# Altium PCB LUX_36.PcbDoc
Units mil, origin at the board's own origin, x right, y up, seen from the top; angles counter-clockwise.
Board outline 2857.83 x 2678 mil, 2 copper layers (Top, Bottom), stack 12.7 mil thick; 77 components, 75 nets, 253 pads, 95 vias.
Unrouted connection lines stored in the file: 1.
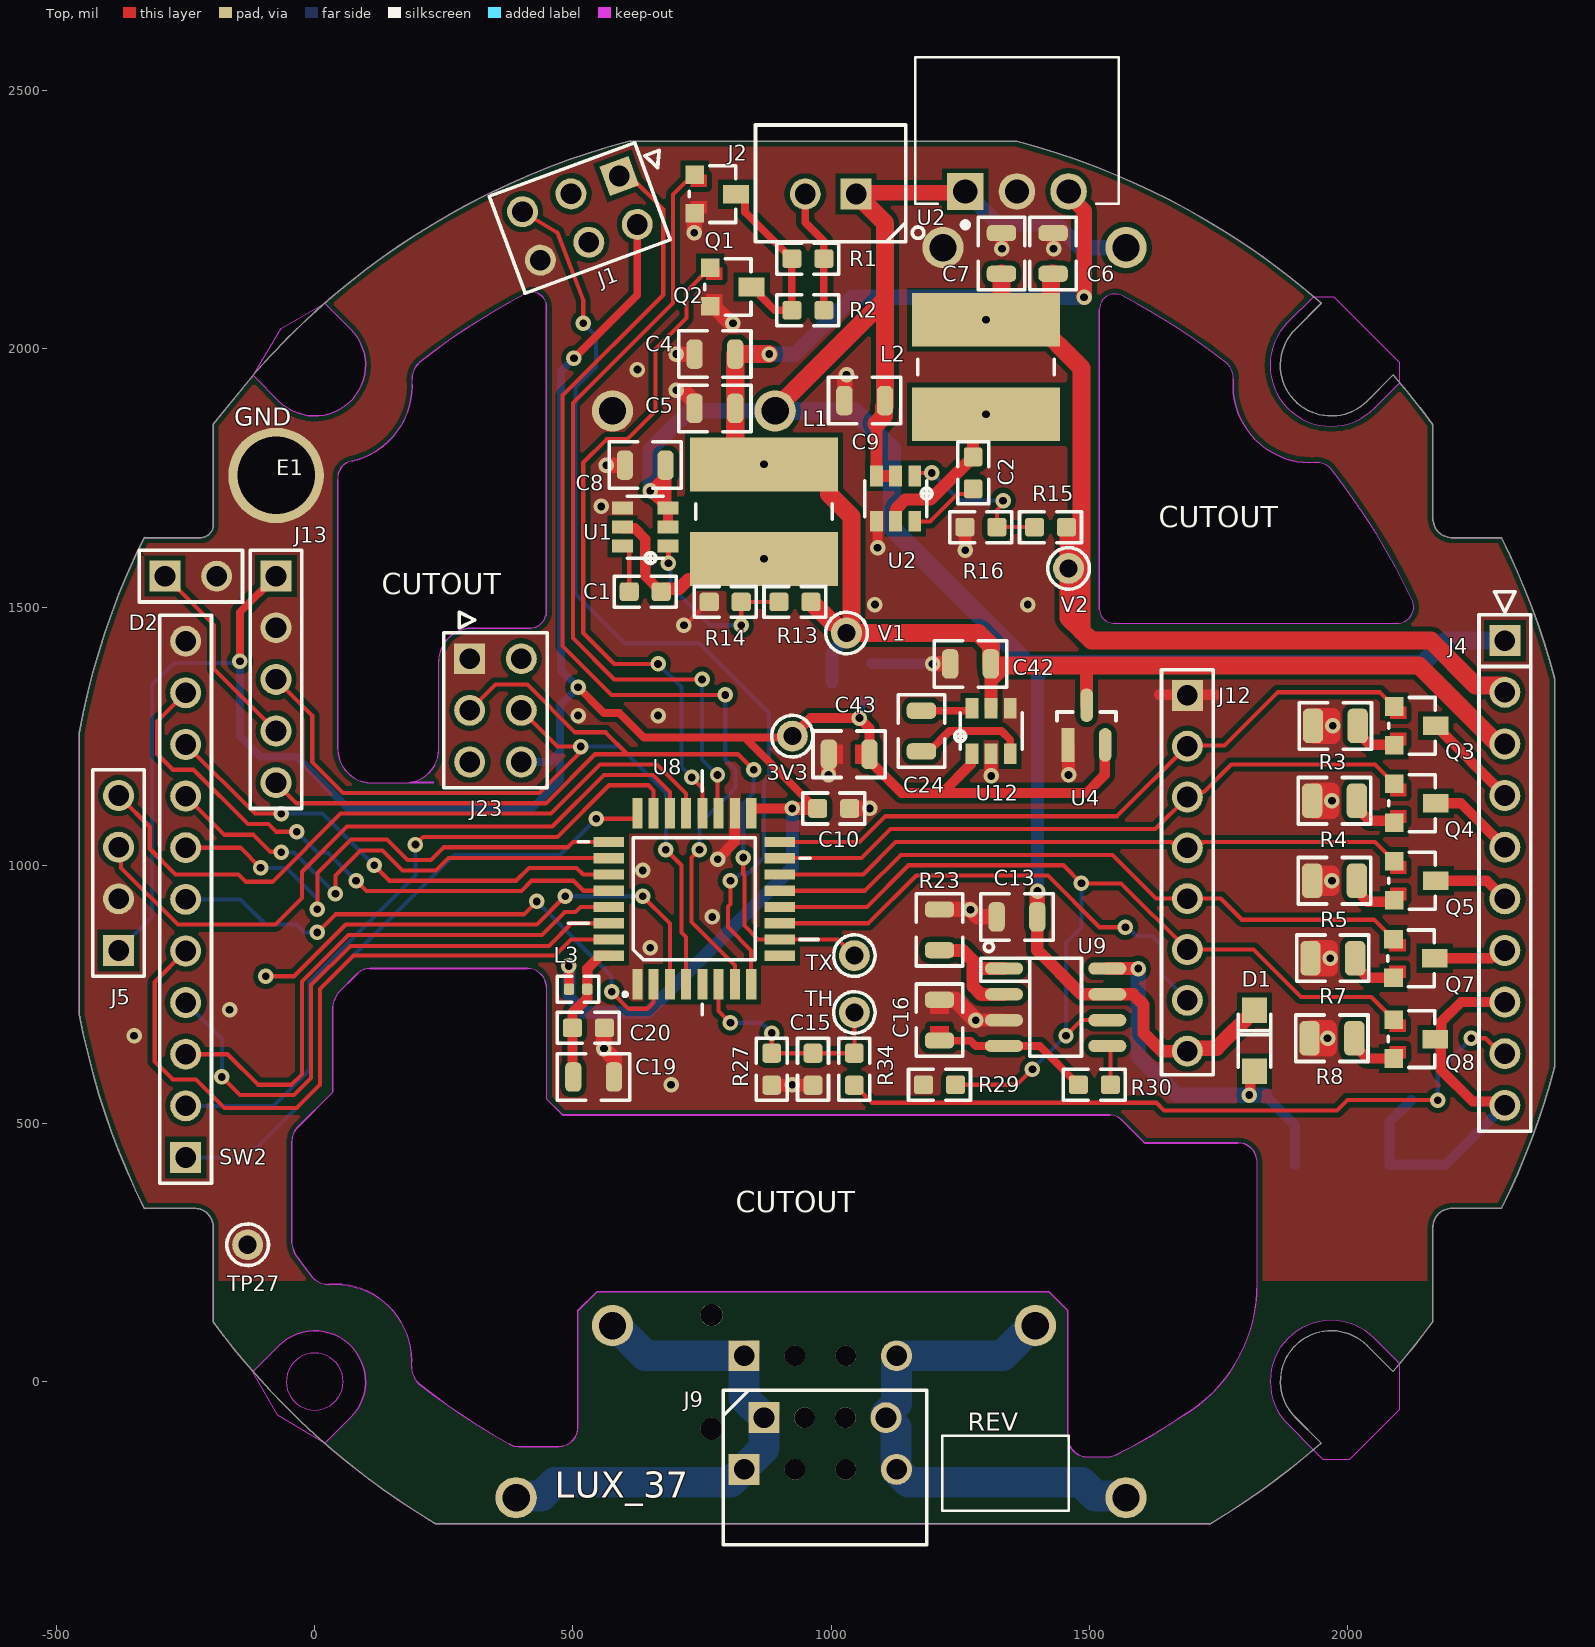
[diagram p0: Top view]
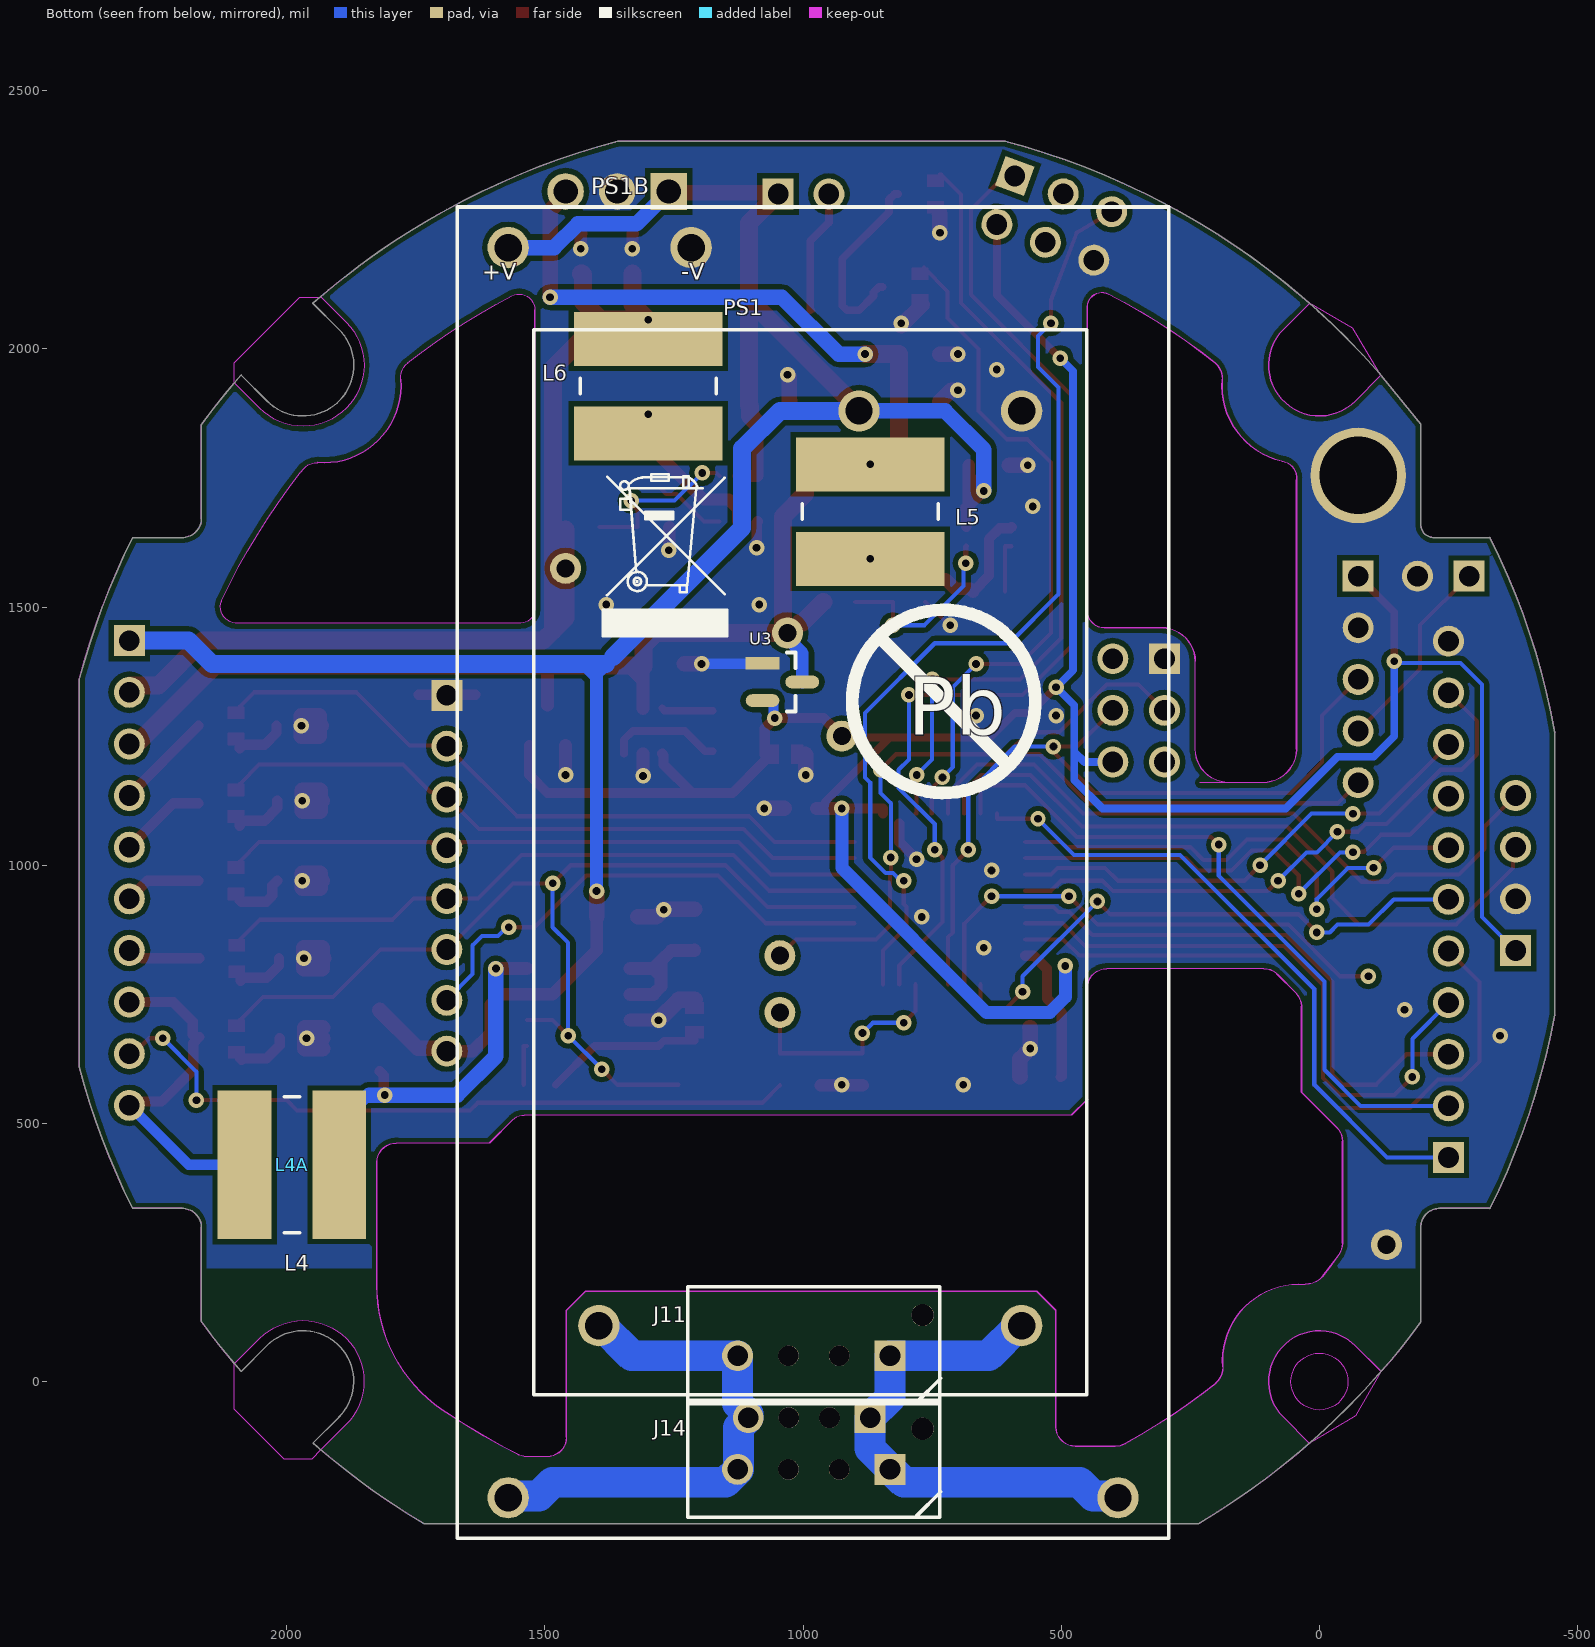
[diagram p1: Bottom view, seen from below]

## Layer stack, top to bottom
Solder Mask Top: solder mask 0.4, Solder Resist, Dk 3.5
Top: signal copper 1.35
Dielectric 1: dielectric 10, FR-4, Dk 4.3
Bottom: signal copper 1.35
Solder Mask Bottom: solder mask 0.4, Solder Resist, Dk 3.5

## Board outline
-455.92,710.72 -456,1257.14 -456.03,1256.97 cw(c917.91,1009.76) -330.5,1634.5 -221.5,1634.5 -221.52,1634.5 ccw(c-221.61,1659.6) -196.5,1659.5 -196.5,1854.5 -110.85,1959 cw(c981.02,993.15) 608.5,2402.5 1358.5,2402.5 1359.4,2402.26 cw(c985.76,987.39) 1949.56,2088.56 1898.92,2037.92 ccw(c1968.42,1968.42) 2037.92,1898.92 2088.59,1949.59 2088.78,1949.37 cw(c1008.19,1005.95) 2165.5,1853.5 2165.5,1671.5 2165.5,1671.52 ccw(c2202.87,1671.87) 2202.5,1634.5 2298.5,1634.5 2298.52,1634.46 cw(c1018.24,995.55) 2401.5,1361.5 2401.5,608.5 2401.8,609.65 cw(c1023.93,972.31) 2298.5,335.5 2202.5,335.5 ccw(c2202.56,298.44) 2165.5,298.5 2165.5,116.5 2166.08,117.31 cw(c1147.65,849.29) 2088.29,19.71 2038.12,69.88 ccw(c1968.62,0.38) 1899.12,-69.12 1949.15,-119.15 1948.73,-119.52 cw(c976.38,990.85) 1734.5,-275.5 234.5,-275.5 233.79,-275.08 cw(c972.55,969.42) -114.16,13.59 cw(c762.8,806.4) -196.5,115.5 -196.5,298.5 -196.5,298.48 ccw(c-233.22,298.78) -233.5,335.5 -330.5,335.5 -330.12,334.73 cw(c961.8,976.04)
cut-out: 1934.06,-132.11 1951.96,-150 2005,-150 2101.32,-53.68 2101.32,34.72 2052.14,83.89 ccw(c1968.62,0.38) 1885.11,-83.14
cut-out: 1884.9,2051.94 ccw(c1968.42,1968.42) 2051.94,1884.9 2101.53,1934.5 2101.55,1934.52 2101.55,1973.45 1975,2100 1936.05,2100 1934.47,2101.59 1934.56,2101.59
cut-out: 69.5,-69.5 19.48,-119.02 -71.5,-65 -119.94,19.06 -69.5,69.5 cw(c0,0)
cut-out: -69.5,1899 -119.02,1949.02 -65,2040 19.06,2088.44 69.5,2038 cw(c0,1968.5)
cut-out: -55.12,0 ccw(c0,0) 0,-55.12 ccw(c0,0) 55.12,0 ccw(c0,0) 0,55.12 ccw(c0,0)
cut-out: 109.71,1159.49 ccw(c109.72,1159.6) 109.72,1159.49 ccw(c110.09,1223.16) 109.76,1159.48 ccw(c109.76,1159.97) 109.78,1159.49 230,1159.49 ccw(c230,1160) 230.51,1160 ccw(c230,1160) 230,1160.51 186.25,1160.51 ccw(c174.65,1225.35) 240.52,1225 ccw(c240.48,1225) 240.52,1225.01 240.52,1395 cw(c305.36,1394.65) 304.16,1459.49 417,1459.49 ccw(c416.89,1491.86) 448.44,1484.59 ccw(c448.75,1485) 449.26,1485 449.26,2081.75 cw(c442.37,2081.74) 449.26,2081.74 449.26,2081.75 ccw(c421.09,2081.74) 408.86,2107.11 ccw(c409,2106.62) 408.76,2107.07 ccw(c991.45,978.13) 202.32,1973.77 ccw(c202.64,1973.37) 202.19,1973.64 ccw(c202.35,1973.15) 202.01,1973.53 ccw(c230.17,1942.03) 187.92,1941.14 ccw(c188.44,1941.15) 187.93,1941.06 ccw(c188.44,1941.04) 187.93,1941 cw(c38.55,1928.98) 188.42,1928.98 cw(c38.58,1928.98) 73.13,1783.18 ccw(c77.14,1750.31) 44.24,1746.64 ccw(c136.34,1756.74) 44.24,1746.62 44.24,1746.64 44.24,1225 ccw(c44.75,1225) 44.24,1224.98 cw(c54.36,1225.02) 44.24,1225.01 44.24,1224.98 ccw(c110.1,1225.35)
cut-out: -4.96,202.03 ccw(c27.57,232.37) 27.24,187.88 ccw(c27.31,188.41) 27.35,187.88 cw(c38.99,39.99) 187.34,39.99 cw(c39.12,39.98) 186.88,28.37 cw(c186.87,28.36) 186.88,28.35 186.88,28.33 cw(c187.35,28.32) 186.88,28.37 186.88,28.33 ccw(c187.39,28.31) 186.88,28.28 ccw(c233.14,29.27) 200.68,-3.7 ccw(c201.13,-3.46) 200.81,-3.86 ccw(c991.32,993.51) 376.27,-120.65 ccw(c376.52,-120.2) 376.84,-120.61 ccw(c377.35,-120.66) 377.08,-121.1 ccw(c393.74,-93.92) 395.2,-125.76 ccw(c392.35,-62.85) 395.24,-125.76 395.19,-125.76 472.75,-125.76 ccw(c472.42,-87.92) 510.27,-88.25 ccw(c510.01,-88.25) 510.26,-88.24 510.26,137.54 546.96,174.24 1421.54,174.24 1458.24,137.54 1458.24,-108.25 ccw(c1495.75,-108.25) 1495.75,-145.76 1535.06,-145.76 ccw(c1535.06,-145.25) 1535.12,-145.76 ccw(c1535.13,-145.22) 1535.15,-145.76 ccw(c1533.07,-99.87) 1550.5,-142.37 ccw(c1550.57,-141.86) 1550.8,-142.32 ccw(c1045.54,866.65) 1551.88,-141.78 ccw(c1548.06,-134.09) 1551.96,-141.74 ccw(c1003.57,950.48) 1683.45,-65.12 ccw(c1683.17,-64.69) 1683.6,-64.96 ccw(c1683.54,-64.45) 1683.8,-64.89 ccw(c1532.37,186.14) 1825.54,186.14 ccw(c1536.83,186.16) 1825.51,190.04 1825.51,425 ccw(c1825.27,425.01) 1825.51,425.03 ccw(c1825.27,425.03) 1825.51,425.04 ccw(c1787.71,424.71) 1787.97,462.52 1607.39,462.38 1562.74,507.06 ccw(c1539.9,484.23) 1539.91,516.51 480.21,516.51 449.51,547.21 449.51,762 ccw(c420.75,762.14) 449.52,762.2 ccw(c411.19,762.2) 412.01,800.51 ccw(c412,800.52) 411.99,800.52 ccw(c411.98,800.13) 411.97,800.51 412,800.51 cw(c412,800.44) 412.01,800.51 107.33,800.51 cw(c107.34,800.13) 107.36,800.51 107.33,800.51 ccw(c107.05,765.77) 80.79,788.52 80.8,788.53 45.47,753.2 ccw(c45.78,752.89) 45.45,753.17 cw(c45.84,752.81) 45.47,753.2 45.44,753.17 ccw(c79.03,723.76) 34.49,726.72 ccw(c35.11,726.67) 34.49,726.67 34.49,560.21 -33.69,492.32 ccw(c-33.35,491.96) -33.71,492.31 ccw(c-33.24,491.84) -33.72,492.29 ccw(c-6.36,465.34) -44.76,465.74 ccw(c-44.56,465.74) -44.76,465.73 ccw(c-44.22,465.74) -44.76,465.71 cw(c-43.31,465.77) -44.76,465.73 -44.76,465.71 -44.76,267.52 ccw(c-44.25,267.52) -44.76,267.47 ccw(c-44.27,267.47) -44.76,267.44 ccw(c0.95,270.15) -37.76,245.69 ccw(c-37.32,245.97) -37.69,245.61 ccw(c-37.22,245.87) -37.66,245.56 ccw(c930.16,938.45) -5.23,202.37 ccw(c-4.83,202.69) -5.08,202.24 ccw(c-4.59,202.38)
cut-out: 1519.75,1496.01 ccw(c1547.09,1496.34) 1546.95,1469 1546.96,1469 2099.6,1469 2099.62,1469 ccw(c2096.87,1500.45) 2126.34,1511.76 2126.69,1510.99 ccw(c942.51,956.28) 1972.5,1761.95 1972.18,1762.37 ccw(c1940.15,1742.28) 1940.15,1780.09 1940.27,1780.1 cw(c1928.27,1929.27) 1779.07,1941.01 1779.08,1941.09 ccw(c1744.12,1944.82) 1764.99,1973.12 1765.35,1972.84 ccw(c968.15,959.78) 1563.93,2102.95 1564.03,2102.9 ccw(c1550.05,2076.03) 1519.75,2076.03

## Design rules (kind name [scope] priority, off if disabled: settings)
Clearance Clearance_1 [All vs InPolygon] p1: gap=10 ignorepadtopadclearanceinfootprint=FALSE
Clearance [All] p2: gap=8 ignorepadtopadclearanceinfootprint=FALSE
ComponentClearance [All] p1: gap=0 collisioncheckmode=3 verticalgap=0 showdistances=FALSE
FanoutControl Fanout_LCC [IsLCC] p1: bgadir=Out bgaviamode=Centered fanoutstyle=Auto fanoutdirection=Alternating viagrid=1 // Fanout_LCC (Default Rule)
FanoutControl Fanout_BGA [IsBGA] p2: bgadir=Out bgaviamode=Centered fanoutstyle=Auto fanoutdirection=Alternating viagrid=1 // Fanout_BGA (Default Rule)
FanoutControl Fanout_Small [(CompPinCount < 5)] p3: bgadir=Out bgaviamode=Centered fanoutstyle=Auto fanoutdirection=OutThenIn viagrid=1 // Fanout_Small (Default Rule)
FanoutControl Fanout_SOIC [IsSOIC] p4: bgadir=Out bgaviamode=Centered fanoutstyle=Auto fanoutdirection=Alternating viagrid=1 // Fanout_SOIC (Default Rule)
HoleSize [All] p1: absolutevalues=TRUE maxlimit=200 minlimit=1 maxpercent=80.000 minpercent=20.000
HoleToHoleClearance [All] p1: gap=0 allowstackedmicrovias=TRUE
MinimumSolderMaskSliver [All] p1: minsoldermaskwidth=0
PolygonConnect [All] p1: connectstyle=Direct reliefconductorwidth=10 reliefentries=4 polygonreliefangle="90 Angle" airgapwidth=10
RoutingVias [All] p1: holewidth=15 width=30 viastyle="Through Hole" minholewidth=15 minwidth=30 maxholewidth=28 maxwidth=50
SilkToSilkClearance [All] p1: silktosilkclearance=0
SilkToSolderMaskClearance [IsPad] p1: minsilkscreentomaskgap=0 clearancetoexposedcopper=TRUE
SolderMaskExpansion [All] p1: expansion=4 istentingtop=FALSE
Width [All] p1: maxlimit=100 minlimit=5 preferedwidth=8
20 further rules are at their usual default settings.

## Components (designator, comment, footprint, x,y, rotation, side; value= is the part's Value field where it differs from the comment)
3V3 "0.035" 0.035 925,1250 r0 top
C1 "_0603" _0603 640,1530 r0 top (schematic designator C4)
C2 "_0603" _0603 1275,1760 r90 top (schematic designator C9)
C4 "_0805" _0805 775,1990 r180 top (schematic designator C22)
C5 "_0805" _0805 775,1885 r180 top
C6 "_0805" _0805 1430,2185 r90 top
C7 "_0805" _0805 1330,2185 r90 top (schematic designator C21)
C8 "_0805" _0805 640,1775 r180 top (schematic designator C1)
C9 "_0805" _0805 1065,1900 r180 top (schematic designator C7)
C10 "_0603" _0603 1005,1110 r0 top
C13 "_0805" _0805 1360,900 r180 top
C15 "_0603" _0603 965,605 r270 top
C16 "_0805C" _0805C 1210,700 r90 top
C19 "_0805" _0805 540,590 r0 top
C20 "_0603" _0603 530,685 r0 top
C24 "_0805" _0805 1175,1260 r270 top
C42 "_0805" _0805 1270,1390 r180 top
C43 "_0805C" _0805C 1035,1215 r180 top
D1 "SOD123F" SOD123F 1820,660 r270 top
D2 "SIP-2P" SIP-2P -290,1560 r0 top
E1 "HOLE128AA" HOLE128AA -75,1755 r0 top
J1 "2X3" 2X3 590,2335 r200.22 top
J2 "JST1X2" JST1X2 999.21,2300 r0 top
J4 "SIP-10" SIP-10 2305,1435 r270 top
J5 "SIP-4PA" SIP-4PA -380,835 r90 top
J9 "JST1X4-2AA" JST1X4-2AA 870,-70 r180 top
J11 "JST1X4-2" JST1X4-2 831.57,50 r180 bottom
J12 "SIP-8P_2.5MM" SIP-8P_2.5MM 1690,1329 r270 top
J13 "SIP-5P" SIP-5P -75,1560 r270 top
J14 "JST1X4-2" JST1X4-2 831.57,-170 r180 bottom
J23 "2X3" 2X3 300,1400 r270 top locked
L1 "IND.6.7MM" IND.6.7MM 870,1685 r270 top (schematic designator L2)
L2 "IND.6.7MM" IND.6.7MM 1300,1965 r270 top
L3 "_0402" _0402 510,760 r180 top
L4 "IND.6.7MM" IND.6.7MM 1990,420 r180 bottom
L4A "IND.6.7MM" IND.6.7MM 1990,420 r180 bottom
L5 "IND.6.7MM" IND.6.7MM 870,1685 r270 bottom (schematic designator L2)
L6 "IND.6.7MM" IND.6.7MM 1300,1928.04 r270 bottom (schematic designator L2)
PS1 "Comment" THRUHOLEPS 576.67,108.33 r90 bottom locked
PS1B "Comment" "THRUHOLEPS - duplicate" 1571.1,-225 r180 bottom locked
Q1 "SOT23-323" SOT23-323 775,2300 r270 top
Q2 "SOT23-323" SOT23-323 805,2120 r270 top
Q3 "SOT23-323" SOT23-323 2130,1270 r270 top
Q4 "SOT23-323" SOT23-323 2130,1120 r270 top
Q5 "SOT23-323" SOT23-323 2130,970 r270 top
Q7 "SOT23-323" SOT23-323 2128.3,819.6 r270 top
Q8 "SOT23-323" SOT23-323 2129,663.31 r270 top
R1 "_0603" _0603 955,2175 r0 top
R2 "_0603" _0603 955,2075 r0 top (schematic designator R1)
R3 "_0805A" _0805A 1976.69,1270 r0 top (schematic designator R7)
R4 "_0805A" _0805A 1975,1125 r0 top (schematic designator R15)
R5 "_0805A" _0805A 1975,970 r0 top (schematic designator R38)
R7 "_0805A" _0805A 1971.69,820 r0 top (schematic designator R31)
R8 "_0805A" _0805A 1970,665 r0 top (schematic designator R67)
R13 "_0603" _0603 930,1510 r180 top
R14 "_0603" _0603 795,1510 r180 top
R15 "_0603" _0603 1425,1655 r180 top (schematic designator R8)
R16 "_0603" _0603 1290,1655 r180 top
R23 "_0805" _0805 1210,875 r270 top
R27 "_0603" _0603 885,605 r270 top
R29 "_0603" _0603 1210,575 r180 top
R30 "_0603" _0603 1510,575 r0 top
R34 "_0603" _0603 1045,605 r90 top
SW2 "SIP-11PA" SIP-11PA -250,434 r90 top
TH "0.035" 0.035 1045,715 r0 top
TP27 "0.035" 0.035 -130,265 r0 top
TX "0.035" 0.035 1045,825 r0 top
U1 "TSOT2-6" TSOT2-6 640,1655 r90 top
U2 "Comment" CONV_VXO7805-500 1260,2305 r0 top
U2 "TSOT2-6" TSOT2-6 1125,1710 r180 top (schematic designator U4)
U3 "AP2210N-3.3TRG1" FP-SOT23-IPC_A 1040,1355 r180 bottom (schematic designator U13)
U4 "AP2138N-3.3TRG" FP-SOT23-IPC_A 1495,1271.55 r90 top (schematic designator U13)
U8 "TQFP-32" TQFP-32 735,935 r90 top
U9 "SOIC-8" SOIC-8 1435,725 r270 top
U12 "TSOT2-6" TSOT2-6 1310,1260 r0 top
V1 "0.035" 0.035 1030,1450 r0 top (schematic designator TP32)
V2 "0.035" 0.035 1460,1575 r0 top (schematic designator TP31)

## Footprints (in the part's own frame and the unit in brackets; to place one, negate y for a bottom-side part, rotate by r counter-clockwise, add the part's x,y. Pads: shape width x height; smd on the part's side, far side on the other; paste and mask are expansions set on the pad)
0.035 [mil]
  round 60 hole 35: 1(0,0)
  silkscreen extent -40,-40 40,40
2X3 [mil]
  rect 60x60 / inner round 60 / far side rect 60x60 hole 40: 1(0,0)
  round 60 hole 40: 2(0,100) 3(100,0) 4(100,100) 5(200,0) 6(200,100)
  silkscreen extent -90,-50 250,150
_0402 [mm]
  rrect40% 0.5x0.55 smd: 1(-0.45,0) 2(0.45,0)
  silkscreen extent -1.02,-0.64 1.02,0.64
_0603 [mil]
  rrect31% 37x36 smd: 1(-31,0) 2(31,0)
  silkscreen extent -60,-30 60,30
_0805 [mm]
  rrect62% 0.8x1.45 smd: 1(-1,0) 2(1,0)
  silkscreen extent -1.78,-1.14 1.78,1.14
_0805A [mm]
  rrect50% 1x1.7 smd: 1(-1.1,0) 2(1.1,0)
  silkscreen extent -1.78,-1.14 1.78,1.14
_0805C [mm]
  rrect62% 0.8x1.45 smd: 1(-1,0) 2(1,0)
  Top region: 0.889,0.457 0.305,0.457 0.305,-0.457 0.889,-0.457 0.889,0.457
  Top region: -0.305,0.457 -0.889,0.457 -0.889,-0.457 -0.305,-0.457 -0.305,0.457
  silkscreen extent -1.78,-1.14 1.78,1.14
CONV_VXO7805-500 [mm]
  rect 1.8x1.8 hole 1.2: 1(0,0)
  round 1.8 hole 1.2: 2(2.54,0) 3(5.08,0)
  silkscreen extent -2.46,-1.74 7.54,6.6
FP-SOT23-IPC_A [mm]
  rect 1.659x0.627 smd paste+0 mask+0: 1(-0.977,0.915)
  rrect100% 1.659x0.627 smd paste+0 mask+0: 2(-0.977,-0.915) 3(0.977,0)
  silkscreen extent 0.23,-1.45 0.65,1.45
HOLE128AA [mil]
  round 185 / inner round 150 / far side round 185 hole 150: 1(0,0)
IND.6.7MM [mm]
  rect 2.65x7.3 smd: 1(-2.325,0) 2(2.325,0)
  silkscreen extent -0.38,-3.35 0.38,3.35
JST1X2 [mil]
  rect 60x60 / inner round 55.12 / far side rect 60x60 hole 40: 1(49.21,0)
  round 60 / inner round 55.12 / far side round 60 hole 40: 2(-49.21,0)
  silkscreen extent -146,-93 180,134
JST1X4-2 [mil]
  rect 60x60 / inner round 55.12 / far side rect 60x60 hole 40: 1(0,0)
  round 40 / inner round 55.12 / far side round 40 hole 40 unplated: 2(-196.85,0) 3(-98.43,0)
  round 60 / inner round 55.12 / far side round 60 hole 40: 4(-295.28,0)
  round 43 / inner round 43.31 / far side round 43 hole 43 unplated: 5(62.99,78.74)
  silkscreen extent -392,-93 98,134
JST1X4-2AA [mil]
  rect 60x60 / inner round 55.12 / far side rect 60x60 hole 40: 1(0,0)
  round 40 / inner round 55.12 / far side round 40 hole 40 unplated: 2(-157.48,0) 3(-78.74,0)
  round 60 / inner round 55.12 / far side round 60 hole 40: 4(-236.22,0)
  silkscreen extent -315,-53 79,246
SIP-2P [mil]
  rect 60x60 / inner round 60 / far side rect 60x60 hole 40: 1(0,0)
  round 60 / inner round 60 / far side rrect100% 60x60 hole 40: 2(100,0)
  silkscreen extent -50,-50 150,50
SIP-4PA [mil]
  rect 60x60 / inner round 60 / far side rect 60x60 hole 40: 1(0,0)
  round 60 hole 40: 2(100,0) 3(200,0) 4(300,0)
  silkscreen extent -50,-50 350,50
SIP-5P [mil]
  rect 60x60 / inner round 60 / far side rect 60x60 hole 40: 1(0,0)
  round 60 hole 40: 2(100,0) 3(200,0) 4(300,0) 5(400,0)
  silkscreen extent -50,-50 450,50
SIP-8P_2.5MM [mil]
  rect 60x60 / inner round 60 / far side rect 60x60 hole 40: 1(0,0)
  round 60 hole 40: 2(98.43,0) 3(196.85,0) 4(295.28,0) 5(393.7,0) 6(492.13,0) 7(590.55,0) 8(688.98,0)
  silkscreen extent -50,-50 735,50
SIP-10 [mil]
  rect 60x60 / inner round 60 / far side rect 60x60 hole 40: 1(0,0)
  round 60 hole 40: 2(100,0) 3(200,0) 4(300,0) 5(400,0) 6(500,0) 7(600,0) 8(700,0) 9(800,0) 10(900,0)
  silkscreen extent -95,-50 950,50
SIP-11PA [mil]
  rect 60x60 / inner round 60 / far side rect 60x60 hole 40: 1(0,0)
  round 60 hole 40: 2(100,0) 3(200,0) 4(300,0) 5(400,0) 6(500,0) 7(600,0) 8(700,0) 9(800,0) 10(900,0) 11(1000,0)
  silkscreen extent -50,-50 1050,50
SOD123F [mm]
  rrect0% 1.25x1.25 smd: 1(-1.5,0) 2(1.5,0)
  silkscreen extent -1.3,-0.8 1.3,0.8
SOIC-8 [mil]
  oval 24x74 smd: 1(-75,-100) 2(-25,-100) 3(25,-100) 4(75,-100) 5(75,100) 6(25,100) 7(-25,100) 8(-75,100)
  silkscreen extent -126,-145 95,50
SOT23-323 [mil]
  rect 36x36 smd: 1(-37.5,-39) 2(37.5,-39)
  rect 36x50 smd: 3(0,41)
  Top region: -13.78,-47.24 -37.4,-47.24 -37.4,-15.75 -13.78,-15.75 -13.78,-47.24
  Top region: 13.78,-47.24 37.4,-47.24 37.4,-15.75 13.78,-15.75 13.78,-47.24
  silkscreen extent -55,-50 55,40
THRUHOLEPS [mil]
  round 80 hole 53: +VO(1771.65,314.96) -VO(1771.65,0) ACL(0,0) ACN(0,818.9)
  silkscreen extent -134,-126 1929,945
"THRUHOLEPS - duplicate" [mil]
  round 80 hole 53: +VO(0,2421.26) -VO(354.33,2421.26) ACL(0,0) ASN(1181.1,0)
  silkscreen extent -98,-79 1280,2500
TQFP-32 [mm]
  rect 1.5x0.5 smd: 1(-4.2,2.8) 2(-4.2,2) 3(-4.2,1.2) 4(-4.2,0.4) 5(-4.2,-0.4) 6(-4.2,-1.2) 7(-4.2,-2) 8(-4.2,-2.8) 17(4.2,-2.8) 18(4.2,-2) 19(4.2,-1.2) 20(4.2,-0.4) 21(4.2,0.4) 22(4.2,1.2) 23(4.2,2) 24(4.2,2.8)
  rect 0.5x1.5 smd: 9(-2.8,-4.2) 10(-2,-4.2) 11(-1.2,-4.2) 12(-0.4,-4.2) 13(0.4,-4.2) 14(1.2,-4.2) 15(2,-4.2) 16(2.8,-4.2) 25(2.8,4.2) 26(2,4.2) 27(1.2,4.2) 28(0.4,4.2) 29(-0.4,4.2) 30(-1.2,4.2) 31(-2,4.2) 32(-2.8,4.2)
  silkscreen extent -5.7,-6.1 6.3,6.2
TSOT2-6 [mil]
  rect 25x40 smd: 1(-37,-44) 2(0,-44) 3(37,-44) 4(37,44) 5(0,44) 6(-37,44)
  silkscreen extent -70,-35 60,35

## Part data
3V3 TH TP27 TX V1 V2: library part "TEST POINT_1"
C1 C2 C10 C15 C20: library part "CAPACITOR NON-POL"
C4 C5 C6 C7 C8 C9 C13 C16 C19 C24 C42 C43: library part "CAPACITOR POL/SM"
D1: library part "DIODE SCHOTTKY_0"
D2: library part LED
E1: library part hole_0
J1: library part CON8AP_0
J2: library part CON2
J4: library part "HEADER 10"
J5: library part CON4AP_5
J9 J11 J14: library part CON4_8
J12: library part "HEADER 10_0"
J13: library part CON4_9
J23: library part "CONN SOCKET 6x2_0"
L1 L2 L3 L4 L4A L5 L6: library part "INDUCTOR FERRITE/SM"
PS1: library part VOFM-5-5
PS1B: library part VOFM-5-5_5
Q1 Q2 Q3 Q4 Q5 Q7 Q8: library part "N DGS_0"
R1 R2 R27 R34: library part RESISTOR/SM
R3 R4 R5 R7 R8 R13 R14 R15 R16 R23 R29 R30: library part RESISTOR
SW2: library part CON4_10
U1 U2: library part NCP3170_0
U3: library part AP2210N-3P3TRG1, Built_By=EMAMatt, Copyright="Copyright (C) 2018 Accelerated Designs. All rights reserved", Manufacturer_Part_Number=AP2210N-3.3TRG1, PCB Footprint=SOT_3P3TRG1_DIO, SourceLibrary=DiodesInc2019-12-05, Vendor="Diodes Inc"
U4: library part AP2210N-3P3TRG1, Manufacturer_Part_Number=AP2210N-3.3TRG1, Built_By=EMAMatt, Copyright="Copyright (C) 2018 Accelerated Designs. All rights reserved", PCB Footprint=SOT_3P3TRG1_DIO, SourceLibrary=DiodesInc2019-12-05, Vendor="Diodes Inc"
U8: library part Xmega8E5
U9: library part NCL30160
U12: library part IC,VREG,LDO,3_1.3V,AP2210, "LM2665"

## Via types
v1: diameter 30, hole 15, Top to Bottom, 89 vias
v2: diameter 30, hole 15, Top to Bottom, tented both sides, 6 vias

## Nets (pads, with @x,y where several pads share a name; then routed paths per layer and width w, separated by ;. In a path a pad name is that pad's centre, name@x,y a point inside that pad or via, vN(x,y) a via of type N, cw(c..) or ccw(c..) an arc to the next point about the centre after c; other vN are vias at no path point)
+3V3: 3V3.1 C10.1 C43.1 J1.2 J5.1 J13.1 J23.6 L3.2 U3.2 U4.2 U8.17 U12.1 | length 5520.4
  Top w15: v1(-145,1395) -145,1490 J13.1 ; v1(502,1982) 624.57,2104.57 J1.2 ; v1@507.13,1347.87 560,1295 590,1295 637.5,1247.5 832.5,1247.5 ; 3V3.1 922.5,1247.5 832.5,1247.5 ; C10.1@957.5,1110 957.5,1122.5 832.5,1247.5
  Top w19.68: 3V3.1 960,1285 v1(1055,1285) 1074.37,1265.63 C43.1
  Top w20: v1(492,805) 492.28,803 L3.2 ; U8.17 845.24,1110 v1(925,1110) ; C43.1@1074.37,1202.2 1136.57,1140 1215,1140 ; U12.1 1270.5,1213.5 1270.5,1195.5 1215,1140 ; U4.2 1530.13,1232.2 1530.13,1175.13 1495,1140 1215,1140
  Top w25: v1(925,1110) 957.5,1110 C10.1
  Bottom w8: J5.1 -315,900 -315,1350 -273,1392 -148,1392 v1(-145,1395)
  Bottom w15: v1(-145,1395) -145,1250 -105,1210 -35,1210 65,1110 420,1110 475,1165 475,1220 ; J23.6 455,1200 475,1220 ; v1(502,1982) 477,1957 477,1378 v1(510,1345) 475,1310 475,1220
  Bottom w19.68: v1(1055,1285) 1055,1287.79 1057.18,1289.98 1057.18,1316.67 1059.49,1318.98 U3.2
  Bottom w25: v1(492,805) 492,745 522,715 645,715 925,995 v1(925,1110)
+6V5: C4.1 C5.1 C42.1 J4.3 L1.1 L5.1 R13.1 U2.3@1460,2305 U3.3 U4.3 U12.5 V1.1 | length 3398.2
  Top w25: C42.1@1309.37,1385 1310,1384.37 1310,1357 ; U12.5 1310,1357 ; 1340,1387 1310,1357 ; U4.3 1495,1387
  Top w30: U2.3@1460,2305 1460,2297.85 1490,2267.85 v1(1490,2100)
  Top w35: v1(880,1990) C4.1 C5.1 814.37,1811.2 849.04,1776.54 v1(870,1776.54) 961.54,1776.54 996.2,1741.87 996.2,1718.8 1039.2,1675.8 1039.2,1465.97 1030,1456.76 V1.1 1039.2,1450 1285,1450 1309.37,1425.63 C42.1@1309.37,1387 ; R13.1 961.5,1510 1001.5,1470 1005,1470 ; C42.1@1309.37,1385 C42.1@1309.37,1387 ; J4.3 2291,1235 2139,1387 1495,1387 1340,1387 C42.1@1309.37,1387
  Bottom w25: U3.3 1001.55,1410.72 1030,1439.18 V1.1
  Bottom w30: v1(880,1990) 930.84,1990 1040.84,2100 v1(1490,2100)
+7V5: C6.1 C7.1 J4.2 L2.1 L6.1 R15.1 V2.1 | length 2009.6
  Top w35: C7.1 1330,2086.54 v1(1300,2056.54) L2.1@1391.54,2056.54 ; C6.1 1427.95,2145.63 1426.2,2143.88 1426.2,2091.2 L2.1@1391.54,2056.54 ; R15.1@1460,1650 V2.1 1460,1479 1484.77,1454.23 ; J4.2@2304,1348 2248.5,1348 2162.14,1434.96 1504.04,1434.96 1484.77,1454.23 ; L2.1@1391.54,2056.54 1484.77,1963.3 1484.77,1454.23
+12V: C8.1 C9.1 C13.1 D1.1 J2.1 J4.1 J12.8 PS1.+VO PS1B.+VO U1.2 U1.3 U2.1@1260,2305 U2.2@1125,1754 U2.3@1088,1754 U9.7 | length 4965.2
  Top w8: v1@1399.37,950 v1(1400,950)
  Top w20: U1.3@679.37,1695 650,1724.37 v1(650,1725) 650,1725.63 C8.1@679.37,1755 ; U1.2 U1.3
  Top w23.62: 1088,1855.14 1088,1754 U2.2@1125,1754
  Top w24: v1(650,1725) 679.37,1725 ; C8.1 679.37,1755 679.37,1725 ; U1.3 679.37,1692 679.37,1695 679.37,1725 ; C13.1 1399.37,835.63 1485,750 U9.7 1585,750 1605,730 1605,675 1640,640 J12.8
  Top w30: J2.1 1050.93,2302.5 1257.5,2302.5 U2.1@1260,2305 ; C13.1 v1@1399.37,950 ; J12.8 1695.74,645.76 1746.71,645.76 D1.1
  Top w35: PS1.+VO@899.15,1890.85 1104.37,2096.06 ; J2.1 1104.37,2244.06 1104.37,2096.06 ; 1088,1855.14 1102.62,1869.76 1102.62,1888.96 1104.37,1890.71 C9.1 1104.37,2096.06
  Bottom w25: 1368.31,1403.31 1381.61,1390 1390.81,1380.81 1400,1371.61 1400,1390 ; v1(1400,950) 1400,1365 1425,1390
  Bottom w30: v1(650,1725) 650,1805 724.98,1879.98 PS1.+VO ; U2.1@1260,2305 1322.86,2242.14 1436.32,2242.14 1482.2,2196.26 PS1B.+VO
  Bottom w35: PS1.+VO 1045.02,1879.98 1118.31,1806.69 1118.31,1653.31 1210,1561.61 1368.31,1403.31 ; 1381.61,1390 1400,1390 1425,1390 2145,1390 2190,1435 J4.1
_UNPAIR: J13.3 J23.4 U8.4 | length 1509.9
  Top w8: J13.3 -5,1290 -5,1200 55,1140 435,1140 510.79,1215.79 510.79,1225.79 v1(515,1230) 470,1230 J23.4 ; v1(680,1030) 710,1000 710,870 719.25,860.75 U8.4
  Bottom w8: v1(515,1230) 590,1230 680,1140 v1(680,1030)
AUX_RX: J5.3 U8.22 | length 1356
  Top w8: J5.3 -375,1030 -375,995 -265,885 -76.25,885 -25,936.25 -25,987.5 62.5,1075 460,1075 560,1175 655,1175 687.76,1142.24 U8.22
DMX_TX: J13.5 J23.3 TX.1 U8.10 | length 1944
  Top w8: J13.5@-65,1160 J13.5 -35,1120 447.48,1120 542.48,1215 606,1215 ; J23.3 350,1350 411.82,1350 504.29,1257.53 563.47,1257.53 606,1215 ; v1(830,1015) 830,983.18 832,981.18 832,883 858.74,856.26 1013.74,856.26 TX.1 ; v1(850,1185) 820,1215 606,1215
  Bottom w8: J13.5@-82,1153 J13.5 ; v1(830,1015) 830,1120 850,1140 v1(850,1185)
FAN_ENA: Q2.1 U8.20 | length 1328.3
  Top w8: v1(665,1390) 580,1390 520,1450 520,1780 565,1825 605,1825 660,1880 660,2000 720,2060 720,2111.5 Q2.1 ; v1(730,1170) 750,1150 750.75,1150 U8.20
  Bottom w8: v1(665,1390) 710,1345 710,1190 v1(730,1170)
FAN_FAST: Q1.1 U8.19 | length 1554.8
  Top w8: Q1.1 732.5,2337.5 694,2299 694,2089 500,1895 500,1440 580,1360 v1(750,1360) ; v1(780,1175) 780,1100.35 U8.19
  Bottom w8: v1(750,1360) 750,1205 v1(780,1175)
GND_POWER.GLOBAL: C4.2 C5.2 C6.2 C7.2 C8.2 C9.2 C10.2 C13.2 C15.2 C16.2 C19.2 C20.2 C42.2 C43.2 D2.2 E1.1 J1.6 J5.2 J12.1 J13.2 J23.1 PS1.-VO PS1B.-VO Q1.2 Q2.2 R3.1 R4.1 R5.1 R7.1 R8.1 R14.2 R16.2 R23.1 R27.2 R29.2 SW2.11 TP27.1 U1.4 U2.2@1360,2305 U2.4 U3.1 U4.1 U8.1 U8.18 U9.3 U12.2 U12.4 | length 2357.2
  Top w8: v2(715,1465) 717.65,1465 762.65,1510 R14.2 ; U4.1 U4.1@1460,1232.07
  Top w20: v1(780.25,1011.45) 780.25,1011.91 813.58,1045.25 U8.18@813.58,1080.83 ; U2.4 1090,1664 v2(1090,1615) ; 1635,1330 1745,1330
  Top w24: R16.2 1259.5,1654.5 1259.5,1610.5 v1(1260,1610) ; C7.2 1330.43,2223.94 1330.43,2194.29 v1(1330.86,2193.85) ; C6.2 1430.43,2223.94 1430.43,2194.29 v1(1430.86,2193.85)
  Top w25: R27.2 v1@925,574 ; v1(925,575) v1@925,574 ; C15.2 v1@925,574 ; v1(1280,700) U9.3 ; v1(1310,1173) U12.2 ; v1(1460,1175) U4.1@1460,1232.07
  Top w30: C20.2 560,685 v1(560,645) 580,625 580,590.63 C19.2 ; v1(565,1775) C8.2 ; v1(700,1920) 713.43,1920 735.63,1897.8 C5.2 ; v1(700,1990) C4.2 ; v1(735,2225) 735,2262.5 Q1.2 ; Q2.2@769.02,2085.98 810,2045 v1(810,2050) ; v1(995,1175) 995,1214.37 C43.2 ; C9.2 1026.38,1900.75 1026.38,1946.38 v1(1030,1950) ; C10.2 v1(1075,1110) ; v1(1196.63,1390) C42.2 ; R23.1 1270,914.37 v1(1270,914) 1284,900 C13.2 ; R7.1 R7.1@1931.69,820 ; R8.1@1930,645 1965,645 v1@1965,665 ; R8.1@1930,665 v1(1961.69,665) v1@1965,665 ; R8.1@1930,685 1965,685 v1@1965,665 ; R5.1 R5.1@1935,970 ; R4.1 R4.1@1935,1125 ; R3.1 R3.1@1936.69,1270 ; R7.1@1931.69,820 v1(1966.69,820) ; R7.1@1931.69,820 1931.69,800 1966.69,800 v1(1966.69,820) ; R7.1@1931.69,820 1931.69,840 1966.69,840 v1(1966.69,820) ; R5.1@1935,970 1935,985 1970,985 v1(1970,970) ; R5.1@1935,970 1935,955 1970,955 v1(1970,970) ; R5.1@1935,970 v1(1970,970) ; R4.1@1935,1125 1935,1145 1970,1145 v1(1970,1125) ; R4.1@1935,1125 1935,1105 1970,1105 v1(1970,1125) ; R4.1@1935,1125 v1(1970,1125) ; R3.1@1936.69,1270 1936.69,1290 1971.69,1290 v1(1971.69,1270) ; R3.1@1936.69,1270 1936.69,1250 1971.69,1250 v1(1971.69,1270) ; R3.1@1936.69,1270 v1(1971.69,1270)
  Top w32: C16.2 1240.63,739.37 v1(1280,700)
  Bottom w20: U3.1 1079.48,1390 v1(1196.63,1390)
  other v1: 690,575 -350,670 -165,720 650,840 770,900 635,990 510,1290 665,1290 1085,1505 1381,1505 625,1960
  other v2: 555,1695
N00593: J1.1 U8.7 | length 2030.6
  Top w8: J1.1 610,2335 675,2270 675,2105 480,1910 480,1425 575,1330 v1(795,1329.99) ; v1(745,1030) 730,1015 730,890 813.74,806.26 U8.7
  Bottom w8: v1(745,1030) 745,1080 815,1150 815,1185 795,1205 v1(795,1329.99)
N01881: 
N01906: 
N06339: C19.1 C20.1 L3.1 U8.32 | length 274.6
  Top w20: C19.1 499,591.63 C20.1 499,714 527.72,742.72 L3.1 527.72,799.76 552.72,824.76 U8.32
N10759: J4.4 Q3.3 | length 190.5
  Top w20: Q3.3 2305,1136 J4.4
N10771: J4.5 Q4.3 | length 169.2
  Top w20: Q4.3 2220,1120 J4.5
N11231: C15.1 R27.1 R34.2 TH.1 U8.6 | length 450.4
  Top w8: U8.6 782.24,717.76 v1(805,695) ; v1(885,675) R27.1 C15.1 R34.2 TH.1
  Bottom w8: v1(805,695) 865,695 v1(885,675)
N11658: J2.2 R1.2 R2.2 | length 245.9
  Top w8: R2.2@980,2075 R2.2
  Top w15: J2.2 950,2245 986,2209 R1.2 R2.2
N63653: Q1.3 Q2.3 R1.1 R2.1 | length 369.3
  Top w15: Q1.3 823,2300 833.5,2289.5 833.5,2265 924,2174.5 924,2084 915,2075 891,2075 863.5,2102.5 863.5,2109.5 853,2120 Q2.3
N168532: Q3.2 R3.2 | length 100.4
  Top w20: R3.2 2020,1256.22 2043,1233.22 2090.28,1233.22 Q3.2 Q3.2@2091,1226.69
N168576: 
N219536: Q4.2 Q5.2 R4.2 R5.2 | length 205.9
  Top w20: R5.2 2027.99,960.31 2027.99,941.31 2039.71,929.6 2088.1,929.6 Q5.2 ; R4.2 2018.31,1111.22 2043,1086.53 2086.97,1086.53 Q4.2 Q4.2@2091,1076.69
N219580: 
N342907: Q7.2 R7.2 | length 103.9
  Top w20: R7.2 2015,806.22 2039.12,782.1 Q7.2 Q7.2@2089.3,776.29
N343067: J4.7 Q7.3 | length 142.1
  Top w20: Q7.3 2278.77,819.6 2294.18,835 J4.7
N782700: C2.1 U2.6 | length 139.1
  Top w8: U2.6 1192,1666 1245,1719 1265,1719 C2.1
N783582: C2.2 L2.2 L6.2 U2.5 | length 308.7
  Top w23.62: U2.5 1125.69,1666.69 1125.69,1690.21 1143.79,1708.3 1192.8,1708.3 1275,1790.5 C2.2 1275,1833.11 1300,1858.11 v1(1300,1873.46)
N784520: 
N786404: R15.2 R16.1 U2.1@1162,1754 | length 324.9
  Top w8: U2.1@1162,1754 1167.86,1759.86 v2(1195.13,1759.86) ; v2(1333,1706.24) 1333,1700.29 1321,1688.29 R16.1 R15.2
  Bottom w8: v2(1195.13,1759.86) 1248.76,1706.24 v2(1333,1706.24)
N794060: 
N803464: 
N803510: C1.1 U1.6 | length 101
  Top w8: U1.6 609,1618 C1.1
N803530: C1.2 L1.2 L5.2 U1.5 | length 393.9
  Top w20: U1.5 598.5,1652.5 619.46,1652.5 640,1631.96 640,1560.5 670.5,1530 C1.2
  Top w25: C1.2 676.5,1535.5 705.5,1535.5 723.8,1553.8 830.33,1553.8 v1(870,1593.46)
N803542: 
N803586: R13.2 R14.1 U1.1 | length 365.6
  Top w8: v1(826,1464.97) R14.1 R13.2
  Top w10: U1.1 685,1617 v1(685,1585)
  Bottom w8: v1(685,1585) 689.21,1580.79 689.21,1540.79 765.03,1464.97 v1(826,1464.97)
N837098: D1.2 L4.2 L4A.2 U9.8 | length 715.4
  Top w20: v1(1810,555) 1811.91,556.91 1811.91,592.86 D1.2
  Top w25: U9.8 v1(1595,800)
  Bottom w20: 1840.08,555 1898.46,496.61 L4A.2
  Bottom w30: v1(1595,800) 1595,630 1670,555 v1(1810,555) 1840.08,555
N837208: R30.2 U9.5 | length 81
  Top w8: U9.5 1541,650 R30.2
N837212: C16.1 R30.1 U9.4 | length 304.5
  Top w15: C16.1 1210.63,660 1270,660 1280,650 U9.4 1404,650 R30.1
N837360: R23.2 U9.1 U9.2 | length 277.2
  Top w25: R23.2 1210.63,835 1255,835 1275,815 ; U9.2 1290,750 1275,765 1275,785 ; U9.1 1290,800 ; 1275,785 1290,800 ; 1275,785 1275,815 ; 1275,815 1290,800
N837532: 
N932039: U8.5
N953396: 
N953927: 
N959513: 
N988707: SW2.6 U8.2 | length 1101.8
  Top w8: v1(5,870) 40,905 405,905 v1(430,930) ; v1(575,755) 608,722 644,722 656.26,734.26 U8.2
  Bottom w8: SW2.6 -144,934 -95,885 -35,885 -20,870 v1(5,870) ; v1(430,930) 575,785 v1(575,755)
N1039649: SW2.5 U8.31 | length 1399.3
  Top w8: SW2.5 -310,774 -310,620 -275,585 -230,585 -175,530 -35,530 10,575 10,760 75,825 465,825 496.26,856.26 U8.31
N1039970: SW2.4 U8.30 | length 1180.4
  Top w8: v1(-180,590) -145,555 -40,555 -7,588 -7,768 68.88,843.88 453.88,843.88 497.76,887.76 U8.30
  Bottom w8: SW2.4 -180,664 v1(-180,590)
N1040293: SW2.3 U8.29 | length 1092.1
  Top w8: SW2.3 -169,634 -110,575 -45,575 -25,595 -25,775 65,865 440,865 484.25,909.25 505,909.25 515,919.25 U8.29
N1041168: SW2.10 U8.28 | length 1142.5
  Top w8: SW2.10 -305,1279 -305,1215 -275,1185 -235,1185 -129.57,1079.57 -89.57,1079.57 -75,1065 v1(-35,1065) ; v1(80,970) 100,950 400,950 420,970 500.75,970 520,950.75 U8.28
  Bottom w8: v1(-35,1065) 5,1025 25,1025 v1(80,970)
N1041815: SW2.9 U8.27 | length 944.6
  Top w8: SW2.9 -116,1100 v1(-65,1100) ; v1(115,1000) 145,970 390,970 415,995 507.24,995 520,982.24 U8.27
  Bottom w8: v1(-65,1100) 15,1100 v1(115,1000)
N1042144: SW2.8 U8.26 | length 979
  Top w8: SW2.8 -175,1059 -119,1059 -86.09,1026.09 -66.09,1026.09 v1(-65,1025) ; v1(40,945) 40,980 88.74,1028.74 131.26,1028.74 170,990 235,990 258.74,1013.74 U8.26
  Bottom w8: v1(-65,1025) -40,1025 v1(40,945)
N1042475: SW2.7 U8.25 | length 1008.7
  Top w8: SW2.7 -144,1034 v1(-105,995) ; v1(5,915) 5,985 70,1050 140,1050 180,1010 225,1010 250,1035 490,1035 500.24,1045.24 U8.25
  Bottom w8: v1(-105,995) -55,995 5,935 v1(5,915)
N16800820: 
N16800826: 
N16801104: J4.6 Q5.3 | length 148.5
  Top w20: Q5.3 2270,970 J4.6
N16802478: C24.1 U12.6 | length 99.9
  Top w15: C24.1 1268.37,1299.37 U12.6
N16802513: C24.2 U12.3 | length 222.3
  Top w15: C24.2 1190,1220.63 1229.37,1260 1330,1260 1347,1243 U12.3
N16802515: U8.3 | length 986.4
  Top w8: v1(-95,785) -40,785 60,885 430,885 v1(485,940) ; v1(635,940) 687.76,887.24 U8.3
  Bottom w8: v1(485,940) v1(635,940)
N16804669: J5.4 U8.21 | length 1352
  Top w8: J5.4 -380,1130 -375,1130 -319.6,1074.6 -319.6,1032.02 -270,982.42 -147.42,982.42 -133,968 -82,968 50,1100 457.64,1100 552.64,1195 663,1195 719.25,1138.75 U8.21
N16827396: SW2.1 U8.24 | length 1265.2
  Top w8: v1(545,1090) 624.76,1090 U8.24
  Bottom w8: SW2.1 -131,434 10,575 10,760 270,1020 475,1020 v1(545,1090)
N16829476: SW2.2 U8.23 | length 1347.6
  Top w8: v1(195,1040) 210,1055 470,1055 570,1155 646.26,1155 656.26,1145 U8.23
  Bottom w8: SW2.2 -80,534 -10,604 -10,775 195,980 v1(195,1040)
N_RESET: J1.5 U8.8 | length 1874.5
  Top w8: J1.5 470,2225 520,2095 v1(520,2050) ; v1(805,970) 805,924.64 800,919.64 800,880.24 845.24,835 U8.8
  Bottom w8: v1(520,2050) 545,2025 545,1965 505,1925 505,1525 600,1430 745,1430 880,1295 880,1170 870,1160 870,1015 840,985 825.95,985 810.95,970 v1(805,970)
Net5V_1: 
NetJ4_10: J4.8 J4.10 L4.1 L4A.1 Q8.3 | length 813.5
  Top w20: J4.10 2297.57,542.43 2242.57,542.43 2181.06,603.94 2181.06,655.31 2169,667.37 2177.93,667.37 2181.87,671.31 2181.87,696.87 2220,735 J4.8
  Bottom w20: L4A.1@2123.7,545 2081.54,502.83 L4A.1 2190,420 J4.10
NetJ9_1: J9.1 J11.1 J14.1 PS1.ACL PS1B.ASN | length 994.3
  Bottom w60: PS1B.ASN 393.83,-221.17 438.83,-221.17 465,-195 805,-195 870,-130 J9.1 831.57,-31.57 J11.1 640.41,50 582.09,108.33 PS1.ACL
NetJ9_4: J9.4 J11.4 J14.4 PS1.ACN PS1B.ACL | length 997.9
  Bottom w60: PS1.ACN 1390.16,108.33 1331.83,50 J11.4 1126.85,-42.61 1106.22,-63.24 J9.4 1125.28,-89.06 1125.28,-170 1150.28,-195 1485,-195 1511.17,-221.17 1567.28,-221.17 PS1B.ACL
NetQ8_2: Q8.2 R8.2 | length 105.1
  Top w20: R8.2 2013.31,651.22 2038.72,625.81 Q8.2 Q8.2@2087.1,622.9
PWM0: J12.2 Q3.1 U8.16 | length 1322.1
  Top w8: U8.16 1055.24,1045.24 1105,1095 1554,1095 1689.57,1230.57 1691.31,1232.31 1762.31,1232.31 1865,1335 2063.5,1335 Q3.1
PWM1: J12.3 Q4.1 U8.15 | length 1281.3
  Top w8: U8.15 1058.74,1013.74 1115,1070 1627.85,1070 J12.3 1699.95,1142.1 1722.1,1142.1 1775,1195 2053.5,1195 Q4.1
PWM2: J12.4 Q5.1 U8.14 | length 1241.5
  Top w8: U8.14 1062.24,982.24 1125,1045 1659.31,1045 1660.64,1043.67 1680.05,1043.67 J12.4 1699.95,1043.67 1719.37,1043.67 1720.69,1044.99 2053.51,1044.99 Q5.1
PWM3: J12.5 Q7.1 U8.13 | length 1285.1
  Top w8: U8.13 1065.75,950.75 1135,1020 1545,1020 1629.7,935.3 J12.5 1754.7,935.3 1795.41,894.59 2051.81,894.59 Q7.1
PWM4: J12.6 Q8.1 R29.1 U8.12 U9.6 | length 2000.2
  Top w8: U8.12 1069.25,919.25 1150,1000 1450,1000 v1(1485,965) 1561.87,965 J12.6 1818.13,836.87 1910.39,744.61 2046.2,744.61 Q8.1 ; R29.1 1360,575 v1(1390,605) ; v1(1455,670) 1485,700 U9.6
  Bottom w8: v1(1390,605) v1(1455,670) 1455,850 1485,880 v1(1485,965)
PWM5: J12.7 U8.11 | length 961
  Top w8: U8.11 1072.76,887.76 1165,980 1420,980 1520,880 v1(1570,880)
  Bottom w8: v1(1570,880) 1573.97,880 1591.08,862.9 1622.1,862.9 1640,845 1640,789.45 1690,739.45 J12.7
STATUS: D2.1 J13.4 | length 419.6
  Top w8: D2.1@-312.31,1537.69 D2.1 ; D2.1@-290,1557.5 -287.5,1557.5 -195,1465 -195,1380 J13.4
TEMPERATURE: J4.9 R34.1 | length 1382.9
  Top w8: R34.1 1079,540 1630,540 1645,525 1980,525 2000,545 v1(2175,545) ; v2(2240,665) 2267.18,665 2297.18,635 J4.9
  Bottom w8: v1(2175,545) 2175,600 v2(2240,665)
pads on no net: J1.3 J1.4 J9.2 J9.3 J11.2 J11.3 J11.5 J14.2 J14.3 J14.5 J23.2 J23.5 U8.9

## Polygon pours and split planes (outlines as drawn)
GND_POWER.GLOBAL on Top "Top-GND_POWER.GLOBAL" (solid, remove dead copper, pour order 1): 2183.03,318.98 2426.02,332.99 2432,333.57 2432,1617.98 2425.2,1618.11 2183.03,1633.98 2183.03,1973.98 1710,2387.99 1599.02,2387.99 1365,2493.98 610,2493.98 395,2386.97 265,2386.97 -197.99,2006.97 -197.99,1653.98 -333.62,1653.98 -488,1245.91 -488,732.12 -339.11,321.97 -198.98,321.97 -198.98,-37.01 195,-264.02 1789.02,-264.02 2183.03,-37.01
GND_POWER.GLOBAL on Bottom "Bottom-GND_POWER.GLOBAL" (solid, remove dead copper, pour order 0): 2183.03,318.98 2426.02,332.99 2433,333.67 2433,1617.96 2425.2,1618.11 2183.03,1633.98 2183.03,1973.98 1710,2387.99 1599.02,2387.99 1365,2493.98 610,2493.98 395,2386.97 265,2386.97 -197.99,2006.97 -197.99,1653.98 -331,1653.98 -488,1238.99 -488,732.23 -339.08,321.97 -198.98,321.97 -198.98,-37.01 195,-264.02 1789.02,-264.02 2183.03,-37.01

## Keep-outs
Keep-Out Layer:
  lines w1: -456.03,1256.97 cw(c917.92,1009.76) -330.33,1634.83 ; -456,711.13 -456,1257.14 ; -455.92,710.72 ccw(c961.8,976.04) -330.12,334.73 ; -330.5,335.5 -233.5,335.5 cw(c-233.2,298.8) -196.5,298.48 -196.5,115.5 ccw(c751.26,797.13) -119.48,19.52 -69.5,69.5 cw(c0,0) 69.5,-69.5 19.38,-119.62 ; -330.5,1634.5 -221.5,1634.5 ; -221.52,1634.5 ccw(c-221.6,1659.6) -196.5,1659.47 -196.5,1854.5 -119.02,1949.02 -69.5,1899 ccw(c0,1968.5) 69.5,2038 19.06,2088.44 cw(c981.35,992.53) 608.5,2402.5 1358.5,2402.5 cw(c985.39,986.69) 1934.51,2101.54 ; -44.25,267.47 ccw(c0.95,270.15) -37.32,245.96 ; -44.25,267.52 -44.25,465.71 cw(c-6.36,465.34) -33.34,491.95 35,560 35,726.67 cw(c79.03,723.76) 45.83,752.83 81.16,788.16 cw(c107.05,765.77) 107.35,800 ; -37.25,245.86 ccw(c930.21,938.49) -4.83,202.69 ; -4.59,202.38 ccw(c27.57,232.37) 27.34,188.4 ; 19.34,-119.59 ccw(c973.45,970.65) 233.79,-275.08 ; 27.31,188.39 cw(c38.99,39.99) 187.39,28.31 ; 44.75,1225 44.75,1746.67 cw(c77.14,1750.31) 73.22,1782.67 ; 44.75,1225.01 ccw(c110.1,1225.35) 109.76,1160 ; 73.17,1782.66 ccw(c38.58,1928.98) 188.45,1941.04 ; 107.33,800 412,800 ; 109.71,1160 230,1160 ; 174.99,1160 ccw(c174.65,1225.35) 240,1225.01 ; 187.39,28.31 ccw(c233.14,29.27) 201.3,-3.59 ; 188.44,1941.15 cw(c230.17,1942.03) 202.35,1973.15 ; 201.13,-3.46 ccw(c991.32,993.51) 376.52,-120.2 ; 202.64,1973.37 cw(c991.45,978.13) 409,2106.62 ; 234.5,-275.5 1734.5,-275.5 ; 240,1225 240,1395 cw(c305.35,1394.66) 305.01,1460.01 ; 296.71,1460 417,1460 ccw(c416.89,1491.86) 448.75,1491.75 ; 377.35,-120.66 ccw(c393.74,-93.92) 395.21,-125.25 472.75,-125.25 ccw(c472.42,-87.92) 509.75,-88.25 509.75,137.75 546.75,174.75 1421.75,174.75 1458.75,137.75 1458.75,-108.25 ccw(c1495.75,-108.25) 1495.75,-145.25 1535.06,-145.25 ; 408.41,2106.31 cw(c421.09,2081.74) 448.75,2081.74 448.75,1485 ; 411.98,800 cw(c411.19,762.2) 449,762 449,547 480,516 1539.91,516 cw(c1539.91,484.24) 1562.37,506.7 1607.18,461.86 1787.97,462 cw(c1787.71,424.71) 1825,425.04 ; 1519.75,1496 1519.75,2076.03 cw(c1550.05,2076.03) 1564.03,2102.9 ; 1519.75,1496.01 ccw(c1547.09,1496.34) 1546.95,1469 2099.6,1469 ccw(c2096.87,1500.45) 2126.34,1511.76 ; 1535.13,-145.25 ccw(c1533.07,-99.87) 1551.69,-141.3 ; 1550.57,-141.86 ccw(c1003.55,950.52) 1683.17,-64.69 ; 1563.93,2102.95 cw(c968.15,959.78) 1765.35,1972.84 ; 1683.54,-64.45 ccw(c1532.37,186.14) 1825,190.22 ; 1734.14,-275.72 ccw(c974.92,992.84) 1934.11,-132.15 ; 1764.99,1973.12 cw(c1744.12,1944.82) 1779.08,1941.09 ; 1779.07,1941.01 ccw(c1928.27,1929.27) 1940.27,1780.1 ; 1825,190.04 1825,425 ; 1934.08,-132.09 1885.13,-83.14 cw(c1968.64,0.38) 2052.16,83.89 2101.33,34.72 ccw(c1149.66,847.67) 2166.08,117.31 ; 1934.56,2101.59 1884.9,2051.94 ccw(c1968.42,1968.42) 2051.94,1884.9 2101.53,1934.5 ; 1940.15,1780.09 cw(c1940.15,1742.28) 1972.18,1762.37 ; 1972.5,1761.95 cw(c942.51,956.28) 2126.69,1510.99 ; 2101.55,1934.52 cw(c997.31,997.22) 2166.12,1852.66 ; 2165.5,116.5 2165.5,298.5 cw(c2202.56,298.44) 2202.5,335.5 2298.5,335.5 ; 2165.5,1671.5 2165.5,1853.5 ; 2165.5,1671.52 ccw(c2202.84,1671.84) 2202.45,1634.5 ; 2202.5,1634.5 2298.5,1634.5 ; 2298.52,1634.46 cw(c1013.36,993.7) 2401.76,1360.53 ; 2299.53,337.57 ccw(c1034.22,968.43) 2401.8,609.65 ; 2401.5,608.5 2401.5,1361.5

## Other copper
Top:
  pour cut-out: -290,195 -290,55 170,-405 1995,-405 2285,-115 2270,-100 2270,195
Bottom:
  pour cut-out: -270.5,219.5 -270.5,35.5 145.5,-380.5 2014.5,-380.5 2304.5,-90.5 2289.5,-75.5 2289.5,219.5

## Silkscreen, mask and mechanical layers (free items; w line width, h text height)
Silkscreen Top:
  lines w5: 1215,-250 1215,-105 1460,-105 1460,-250 1215,-250
  text "GND" at -156,1851 h35
  text "CUTOUT" at 1635,1655 h40
  text "CUTOUT" at 130,1525 h40
  text "CUTOUT" at 815,328 h40
  text "REV" at 1265,-95 h35
  text "LUX_37" at 465,-225 h50
Silkscreen Bottom:
  circle w25: c727.5,1317.5 r177.34
  circle w5: c1321.12,1549.64 r7.2
  circle w5: c1345.96,1735.4 r8.29
  circle w5: c1321.12,1549.64 r18.58
  region: 1147,1495 1387,1495 1387,1445 1147,1445 1147,1495
  region: 1252,1685 1306,1685 1306,1672 1252,1672 1252,1685
  region: 1319,1552 1324,1552 1324,1547 1319,1547 1319,1552
  lines w5: 1151.88,1525.12 1379.38,1752.62 ; 1152.22,1750.22 1379.72,1522.72 ; 1194.76,1730 1207,1730 ; 1204.48,1730.01 cw(c1230.26,1725.7) 1226.8,1751.6 1304.2,1751.6 ; 1303.84,1542.44 1224.28,1542.44 1207,1730 ; 1304.19,1751.6 cw(c1304.19,1703.77) 1337.66,1737.94 ; 1322.92,1567.28 1336.24,1730 ; 1339.48,1730 1207,1730 ; 1147,1443.52 1147,1495 1388.2,1495 1388.2,1443.52 1147,1443.52 ; 1221.4,1730.72 1221.4,1753.4 1232.2,1753.4 1232.2,1730.72 1221.4,1730.72 ; 1225.72,1528.4 1225.72,1542.44 1238.68,1542.44 1238.68,1528.4 1225.72,1528.4 ; 1252,1670.24 1252,1685 1306,1685 1306,1670.24 1252,1670.24 ; 1259.92,1744.76 1259.92,1757.36 1294.48,1757.36 1294.48,1744.76 1259.92,1744.76 ; 1333,1688.96 1333,1709.48 1354.24,1709.48 1354.24,1688.96 1333,1688.96
  lines w25: 612.5,1202.5 847.5,1437.5
  text "-V" at 1236.06,2133.94 h31.5
  text "+V" at 1621.06,2133.94 h31.5
  text "Pb" at 797.5,1252.5 h112.5
Layer_10:
  circle w3.94: c0,0 r55.12
  circle w3.94: c0,1968.5 r55.12
  circle w1: c1969.02,1968.98 r75
  circle w1: c1969.02,0 r75
  lines w1: 0,0 1969,1969 ; 0,1969 1969,0
Drill Drawing:
  text "CUTOUT" at 1635,1655 h40
  text "CUTOUT" at 130,1525 h40
  text "CUTOUT" at 815,328 h40